# Altium PCB psyduck 2.PcbDoc
Units mm, origin at the board's own origin, x right, y up, seen from the top; angles counter-clockwise.
Board outline 38.11 x 25.41 mm, 2 copper layers (Top Layer, Bottom Layer); 15 components, 14 nets, 77 pads, 15 vias.
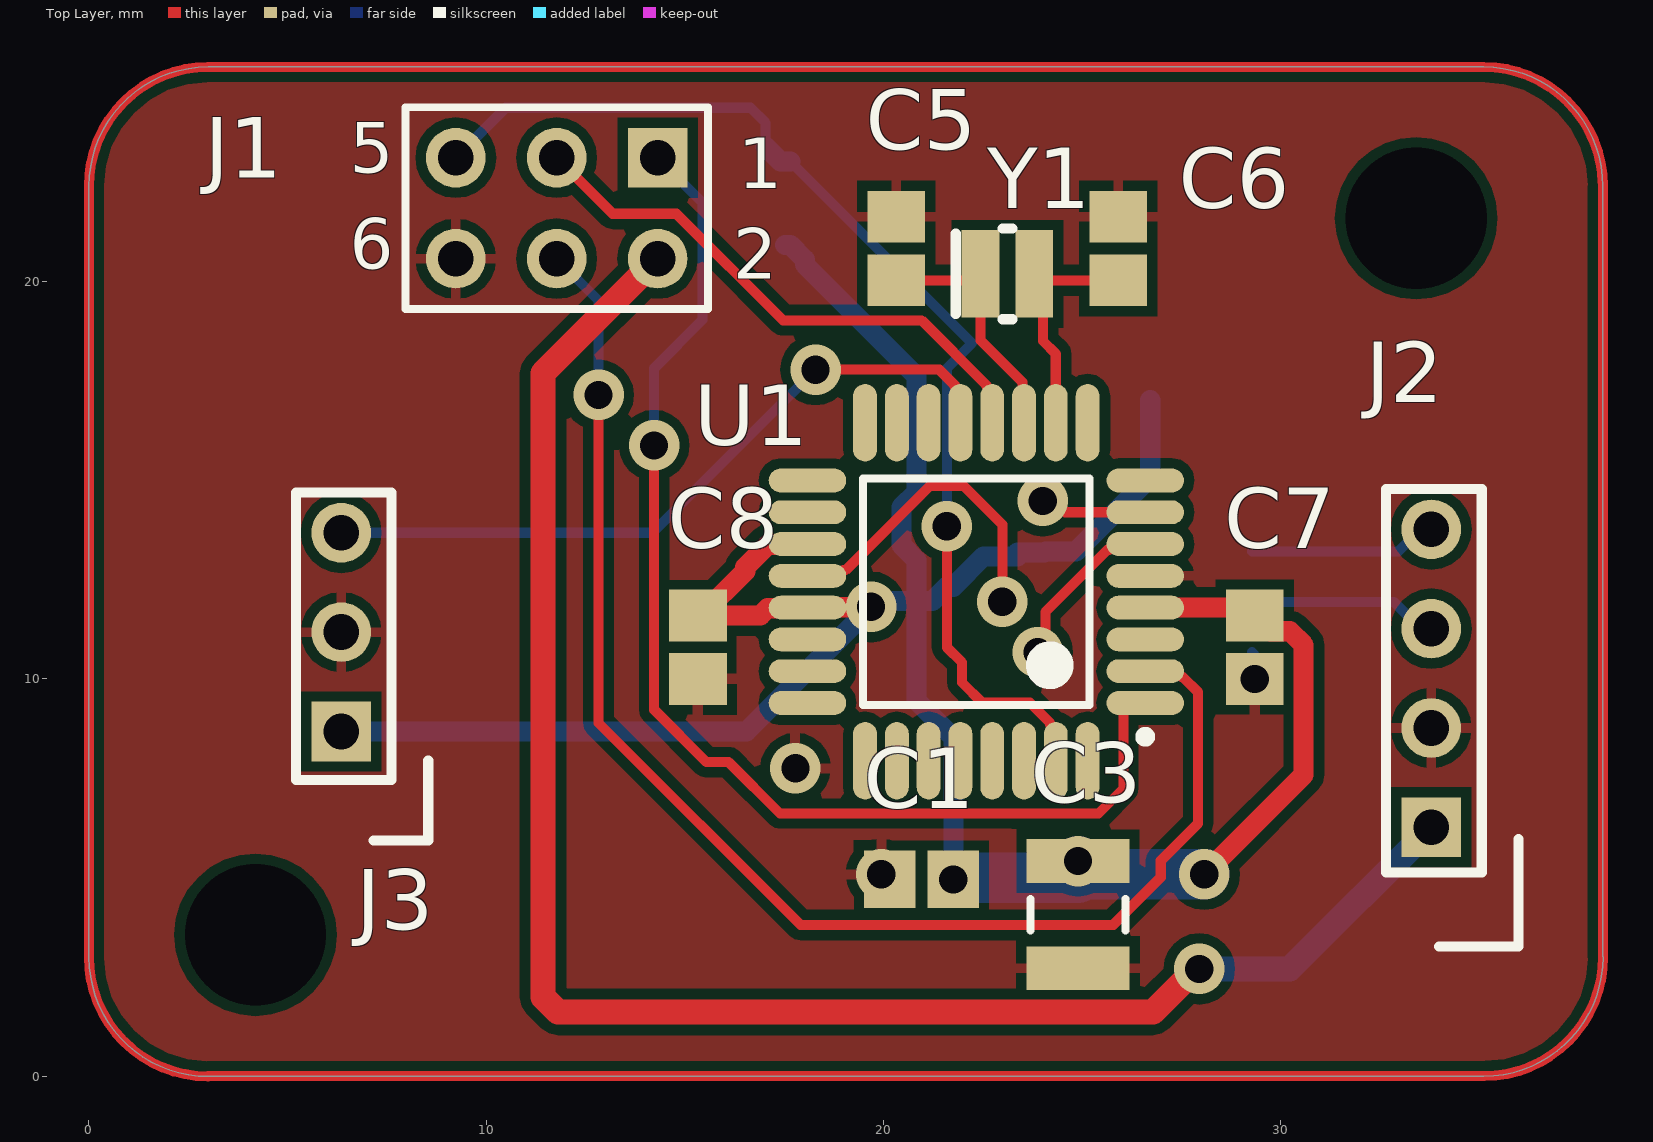
[diagram p0: Top Layer view]
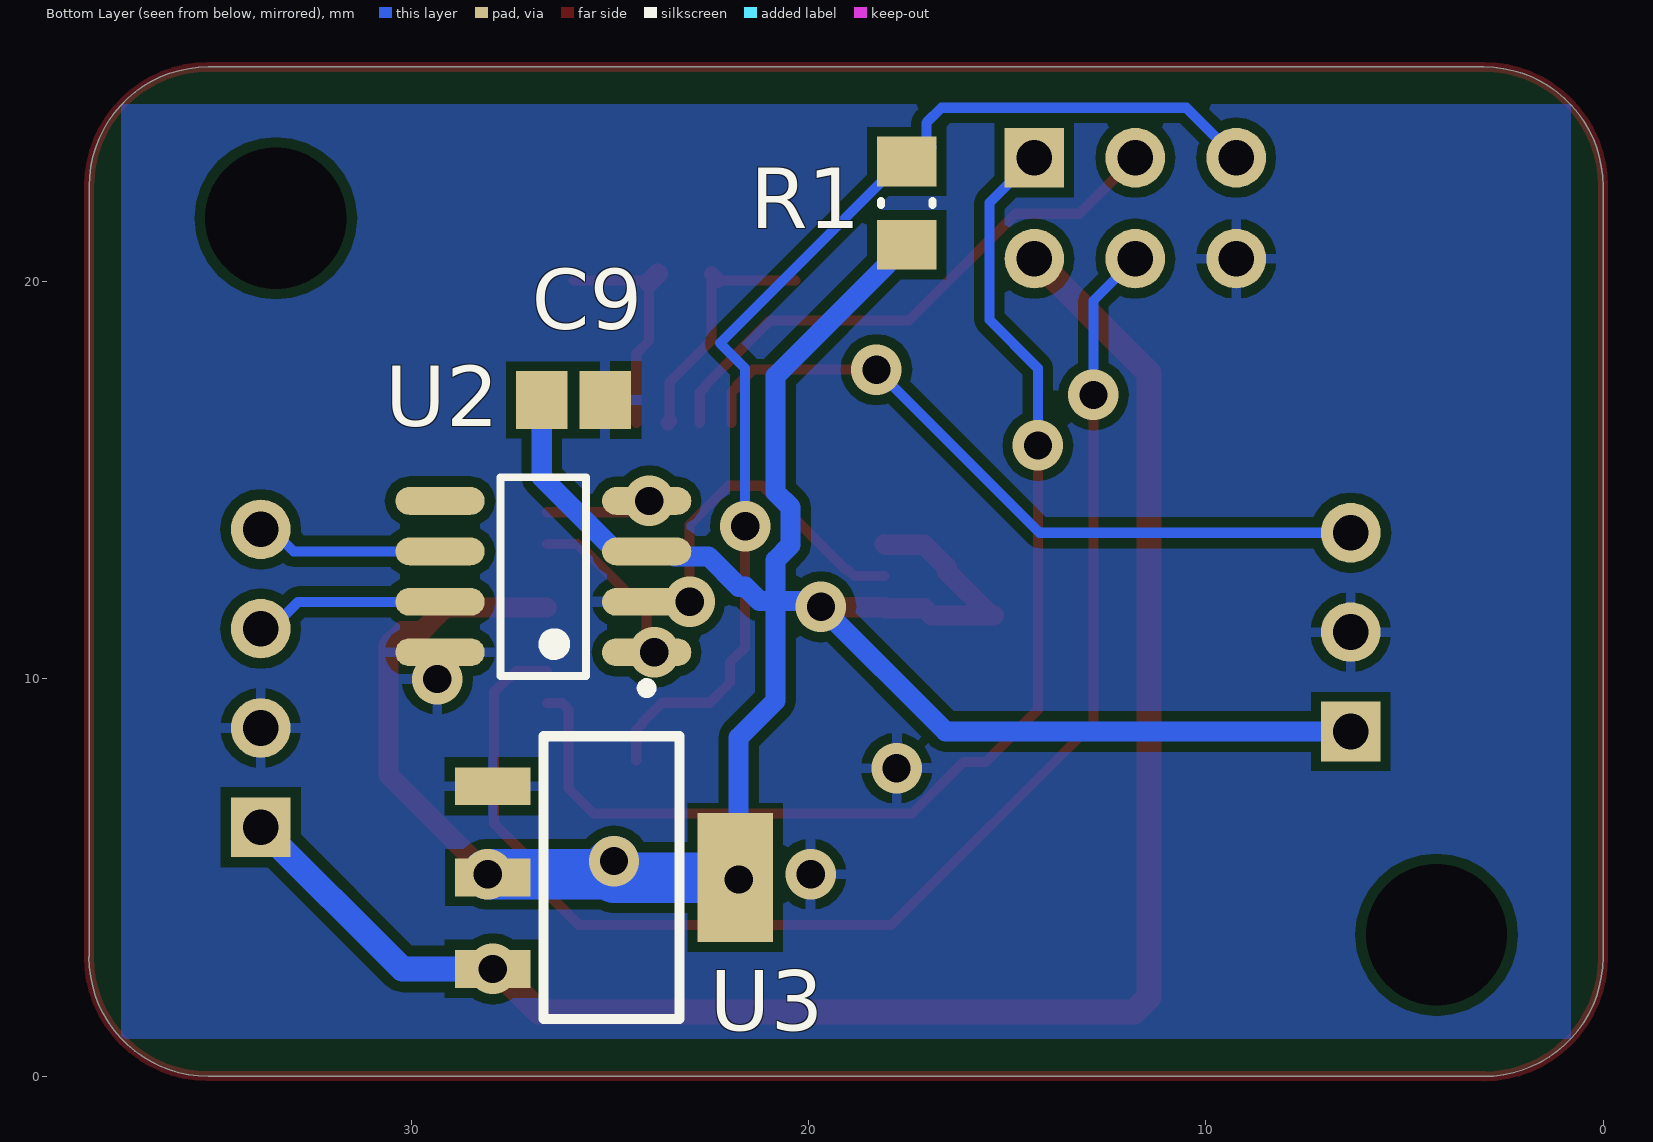
[diagram p1: Bottom Layer view, seen from below]

## Layer stack, top to bottom
Top Solder: solder mask 0.0102, Solder Resist, Dk 3.5
Top Layer: signal copper 0.0356
Dielectric 1: dielectric 0.32, FR-4, Dk 4.8
Bottom Layer: signal copper 0.0356
Bottom Solder: solder mask 0.0102, Solder Resist, Dk 3.5

## Board outline
0,2.994 0,22.4 cw(c3,22.4) 3,25.4 35.1,25.4 cw(c35.1,22.4) 38.1,22.4 38.1,3 38.106,3 cw(c35.106,3) 35.106,0 3,0 3,-0.006 cw(c3,2.994)

## Design rules (kind name [scope] priority, off if disabled: settings)
Clearance [All] p1: gap=0.254 ignorepadtopadclearanceinfootprint=FALSE except(0: Arc-Hole Track-Hole SMDPad-Hole THPad-Hole Via-Hole Fill-Hole Poly-Hole Region-Hole Text-Hole; 0.19: SMDPad-SMDPad; 0.23: Arc-SMDPad Track-SMDPad)
PolygonConnect [All] p1: connectstyle=Relief reliefconductorwidth=0.254 reliefentries=4 polygonreliefangle="90 Angle" airgapwidth=0.254
RoomDefinition Psyduck [InComponentClass('Psyduck')] p1: confinementstyle=ConfineIn formatcopy=TRUE lockcomponents=FALSE outline 0,0 38.922,0 38.922,26.289 0,26.289
RoutingVias [All] p1: holewidth=0.711 width=1.27 viastyle="Through Hole" minholewidth=0.711 minwidth=1.27 maxholewidth=0.711 maxwidth=1.27
SolderMaskExpansion [All] p1: expansion=0.102 istentingtop=FALSE
Width [All] p1: maxlimit=2 minlimit=0.254 preferedwidth=0.254 minimp=50.000000 maximp=50.000000 favimp=50.000000
30 further rules are at their usual default settings.

## Components (designator, comment, footprint, x,y, rotation, side; value= is the part's Value field where it differs from the comment)
C1 "100nF" CAPC2013X88X50NL20T25 20.955,4.953 r0 top
C3 "" C1210 24.892,4.064 r90 top value=100uF
C5 "10p" CAPC2013X88X50NL20T25 20.32,20.828 r270 top
C6 "10p" CAPC2013X88X50NL20T25 25.908,20.828 r270 top
C7 "100n" CAPC2013X88X50NL20T25 29.337,10.795 r270 top
C8 "100p" CAPC2013X88X50NL20T25 15.328,10.795 r90 top
C9 "100n" CAPC2013X88X50NL20T25 25.908,17.018 r0 bottom
J1 "ISP-6" HDR2X3 14.313,23.114 r180 top
J2 "B4B-EH-A" "JST connector" 33.782,13.763 r270 top
J3 "B3B-EH-A" B3B-EH-A 6.35,13.676 r270 top
R1 "10k" RESC0805(2012)_M 17.526,21.971 r90 bottom value="10000.00 Ohm"
U1 "ATmega32M1-AU" 32A_M 22.333,12.192 r180 top
U2 "TJA1050T/CM,118" NXP-SOT96-1_M 26.67,12.573 r0 bottom
U3 "NCP117" MCP1799 24.892,5 r270 bottom
Y1 "Crystal" XRCHA16M000F0A01R0 23.114,20.193 r0 top

## Footprints (in the part's own frame and the unit in brackets; to place one, negate y for a bottom-side part, rotate by r counter-clockwise, add the part's x,y. Pads: shape width x height; smd on the part's side, far side on the other; paste and mask are expansions set on the pad)
32A_M [mm] "Thin QFP, 32-Leads, Body 7x7mm, Pitch 0.8mm, IPC Low Density"
  oval 1.95x0.6 smd: 1(-4.25,2.8) 2(-4.25,2) 3(-4.25,1.2) 4(-4.25,0.4) 5(-4.25,-0.4) 6(-4.25,-1.2) 7(-4.25,-2) 8(-4.25,-2.8) 17(4.25,-2.8) 18(4.25,-2) 19(4.25,-1.2) 20(4.25,-0.4) 21(4.25,0.4) 22(4.25,1.2) 23(4.25,2) 24(4.25,2.8)
  oval 0.6x1.95 smd: 9(-2.8,-4.25) 10(-2,-4.25) 11(-1.2,-4.25) 12(-0.4,-4.25) 13(0.4,-4.25) 14(1.2,-4.25) 15(2,-4.25) 16(2.8,-4.25) 25(2.8,4.25) 26(2,4.25) 27(1.2,4.25) 28(0.4,4.25) 29(-0.4,4.25) 30(-1.2,4.25) 31(-2,4.25) 32(-2.8,4.25)
  silkscreen extent -4.38,-2.85 2.85,3.77, body extent -3.5,-3.5 3.5,3.5, height 1.2
B3B-EH-A [mm] "JST connector 3 pin vert"
  rect 1.5x1.5 hole 0.9: 1(5,0)
  round 1.5 hole 0.9: 2(2.5,0) 3(0,0)
  silkscreen extent -1.02,-1.14 7.74,2.19, body extent -2.37,-1.85 7.57,1.95, height 6
C1210 [mm] "Chip Capacitor, Body 3.2x2.5mm, IPC High Density"
  rect 1.1x2.6 smd: 1(-1.35,0) 2(1.35,0)
  silkscreen extent -0.4,-1.2 0.4,1.2, body extent -1.7,-1.35 1.7,1.35, height 1.3
CAPC2013X88X50NL20T25 [mm] "Chip Capacitor, 2-Leads, Body 2.00x1.25mm, IPC Medium Density"
  rect 1.3x1.45 smd: 1(-0.8,0) 2(0.8,0)
  body extent -1.1,-0.72 1.1,0.72, height 0.88
HDR2X3 [mm] "Connector; Header; 3x2 Position"
  rect 1.5x1.5 hole 0.9: 1(0,0)
  round 1.5 hole 0.9: 2(0,2.54) 3(2.54,0) 4(2.54,2.54) 5(5.08,0) 6(5.08,2.54)
  silkscreen extent -1.27,-1.27 6.35,3.81
"JST connector" [mm]
  rect 1.5x1.5 hole 0.9: 1(7.5,0)
  round 1.5 hole 0.9: 2(5,0) 3(2.5,0) 4(0,0)
  silkscreen extent -1.02,-1.14 10.5,2.2, body extent -2.44,-1.9 10.06,1.9, height 6
MCP1799 [mm] "Voltage Regulators"
  rect 0.95x1.9 smd: 1(-2.3,-3.05) 2(0,-3.05) 3(2.3,-3.05)
  rect 3.25x1.9 smd: 2(0,3.05)
  silkscreen extent -3.56,-1.78 3.56,1.65
NXP-SOT96-1_M [mm] "SOIC, 8-Leads, Body 5x4mm, Pitch 1.27mm, IPC Low Density"
  oval 2.25x0.7 smd: 1(-2.6,1.905) 2(-2.6,0.635) 3(-2.6,-0.635) 4(-2.6,-1.905) 5(2.6,-1.905) 6(2.6,-0.635) 7(2.6,0.635) 8(2.6,1.905)
  silkscreen extent -2.72,-2.5 1.07,2.93, body extent -2,-2.5 2,2.5, height 1.75
RESC0805(2012)_M [mm] "Chip Resistor, Body 2.0x1.3mm, IPC Low Density"
  rect 1.25x1.5 smd: 1(-1.05,0) 2(1.05,0)
  silkscreen extent -0.05,-0.65 0.05,0.65, body extent -1.1,-0.67 1.1,0.67, height 0.7
XRCHA16M000F0A01R0 [mm]
  rect 0.95x2.2 smd: 1(-0.675,0) 2(0.675,0)
  silkscreen extent -1.3,-1.14 0.13,1.14

## Part data
C1 C5 C6 C7 C8 C9: library part CMP-2007-00279-1, Manufacturer=Samsung, Part Number=CL21B104JBCNNNC
C3: library part "Cap Semi", "Capacitor (Semiconductor SIM Model)", LatestRevisionDate=29-May-2009, LatestRevisionNote="IPC-7351 Footprint Added.", PackageDescription="Chip Capacitor", PackageReference=C1206, Published=8-Jun-2000, Publisher="Altium Limited"
J1: library part "Header 3X2", "Header, 3-Pin, Dual row", LatestRevisionDate=17-Jul-2002, LatestRevisionNote="Re-released for DXP Platform.", Publisher="Altium Limited"
J2: library part MHDR1X4, "Header, 4-Pin", LatestRevisionDate=17-Jul-2002, LatestRevisionNote="Re-released for DXP Platform.", Publisher="Altium Limited"
J3: library part MHDR1X3, "Header, 3-Pin", LatestRevisionDate=17-Jul-2002, LatestRevisionNote="Re-released for DXP Platform.", Publisher="Altium Limited"
R1: library part CMP-1013-00528-1, Case-EIA=0805, Case-Metric=2012, Technology=SMT
U1: library part CMP-0096-00150-2, "8-bit AVR Microcontroller, 2.7-5.5V, 16MHz, 32KB Flash, 1KB EEPROM, 2KB SRAM, Industrial Grade (-40° to +85°C), 32-Pin TQFP", Code_JEDEC=MS-026-ABA, ComponentLink1Description="Manufacturer URL", ComponentLink1URL=http://www.atmel.com/, ComponentLink2Description="ATmega16M1/32M1/64M1 Datasheet", ComponentLink2URL=http://www.atmel.com/dyn/resources/prod_documents/doc8209.pdf, ComponentLink3Description="ATmega16M1/32M1/64M1 Summary", ComponentLink3URL=http://www.atmel.com/dyn/resources/prod_documents/8209S.pdf, DatasheetVersion="revD, Nov-2010", PackageDescription="32-Lead, 7x7x1.0 mm Body, 0.8mm Lead Pitch, Thin Profile Plastic Quad Flat Package (TQFP)", PackageReference=32A, PackageVersion="revC, Oct-2010", RevisionNote="DatasheetVersion & PackageVersion updated. URLs added."
U2: library part CMP-2000-04923-1, "High speed CAN transceiver, 4.75 to 5.25 V, -40 to 150 degC, 8-Pin SO (SOT96-1), RoHS, Tape and Reel", Manufacturer="NXP Semiconductors", Package / Case="8-SOIC(0.154\",3.90mmWidth)", Package Description="8-Pin Small Outline Integrated Circuit, Body 4.9 x 3.9 mm, Pitch 1.27 mm", Package Reference=SOT96-1, Standard Package=1, Supplier Device Package=8-SO, Voltage - Supply=4.75V~5.25V, <PCN>=http://media.digikey.com/pdf/PCNs/NXP/201209019F04_TJA1050_Obs.pdf, Category=IntegratedCircuits(ICs), Datasheet URL=http://www.nxp.com/documents/data_sheet/TJA1050.pdf, Datasheet Version="Rev. 4, 10/2003", Duplex=Half, Dynamic Catalog=CANTransceivers, Family=Interface-Drivers,Receivers,Transceivers, Manufacturer URL=http://www.nxp.com/, Minimum Quantity=Transceiver, Mounting Type=SurfaceMount, Number of Drivers/Receivers=1/1, Other Names=568-10292-1, Package/Case="8-SOIC(0.154\",3.90mmWidth)", Packaging=CutTape(CT), PCN Obsolescence="TJA105028/Apr/2013 /  / MultipleDevices19/Apr/2013", PCN Packaging=LighterPackingReels30/Mar/2014, Product Training Modules=CANandLINBusTransceiver, Protocol=CAN, Quantity Available=CutTape(CT)AlternatePackaging, Receiver Hysteresis=70mV, Type=Transceiver
Y1: library part XTAL, "Crystal Oscillator", LatestRevisionDate=17-Jul-2002, LatestRevisionNote="Re-released for DXP Platform.", PackageDescription="Crystal, Thru-Hole; 2 Leads; Body 3.1 x 8.2 mm (Dia.xH)", PackageReference=R38, Published=8-Jun-2000, Publisher="Altium Limited"

## Free pads (board coordinates)
  round 1.524 hole 3.556: 2(4.191,3.556) 3(33.401,21.59)

## Via types
v1: diameter 1.27, hole 0.711, Top Layer to Bottom Layer, 15 vias

## Nets (pads, with @x,y where several pads share a name; then routed paths per layer and width w, separated by ;. In a path a pad name is that pad's centre, name@x,y a point inside that pad or via, vN(x,y) a via of type N, cw(c..) or ccw(c..) an arc to the next point about the centre after c; other vN are vias at no path point)
5V: C1.2 C3.2 C7.1 C8.2 C9.2 J3.1 R1.1 U1.4 U1.19 U1.21 U2.3 U3.2 | length 69
  Top Layer w0.381: v1(21.755,4.953) C1.2@21.755,4.954
  Top Layer w0.508: C8.2 C8.2@15.403,11.595 ; U1.19 18.067,13.376 17.083,13.376 16.518,12.811 16.518,12.709 C8.2@15.403,11.595 ; v1(19.685,11.811) 19.676,11.802 18.092,11.802 U1.21 18.067,11.776 17.083,11.776 16.902,11.595 C8.2@15.403,11.595 ; U1.4 29.14,11.792 C7.1 29.733,11.199 30.226,11.199 30.57,10.855 30.57,7.583 v1(28.067,5.08)
  Bottom Layer w0.508: J3.1 16.55,8.676 v1(19.685,11.811) 19.831,11.957 20.828,11.957 ; R1.1 17.651,20.921 18.022,20.55 18.022,20.425 20.828,17.619 20.828,14.697 20.447,14.316 20.447,13.37 20.828,12.989 20.828,11.957 ; v1(21.755,4.953) 21.755,8.523 20.828,9.45 20.828,11.957 ; C9.2 26.708,15.071 24.845,13.208 U2.3 24.041,13.179 23.368,13.179 23.368,13.081 22.514,13.081 21.752,12.319 21.59,12.319 21.228,11.957 20.828,11.957
  Bottom Layer w1.27: U3.2@21.842,5 24.892,5 v1(24.892,5.414) 25.226,5.08 v1(28.067,5.08)
GND: C1.1 C3.1 C5.1 C6.1 C7.2 C8.1 C9.1 J1.6 J2.2 J3.2 U1.5 U1.20 U2.2 U2.8 U3.1 | length 8.9
  Top Layer w0.254: U1.20 18.851,12.592 18.994,12.735 19.045,12.735 21.169,14.859 22.011,14.859 22.987,13.883 v1(22.987,11.938)
  Bottom Layer w0.254: U2.8 29.337,10.601 v1(29.337,9.995)
  other v1: 19.939,5.08 17.78,7.747
NetC5_2: C5.2 U1.11 Y1.1 | length 6.4
  Top Layer w0.254: C5.2 Y1.1@22.274,20.028 ; Y1.1 22.439,18.521 23.491,17.47 U1.11@23.491,16.484
  Top Layer w0.381: Y1.1@22.274,20.028 Y1.1 ; U1.11@23.491,16.484 U1.11
NetC6_2: C6.2 U1.10 Y1.2 | length 5.9
  Top Layer w0.254: Y1.2@23.954,20.028 C6.2 ; Y1.2@24.01,19.972 24.01,18.502 24.333,18.179 U1.10
  Top Layer w0.508: Y1.2 23.954,20.028 Y1.2@24.01,19.972
NetJ1_1: J1.1 U1.1 | length 30.6
  Top Layer w0.254: v1(14.224,15.875) 14.224,9.22 15.54,7.904 16.099,7.904 17.393,6.61 25.405,6.61 26.035,7.24 26.035,9.232 26.195,9.392 U1.1
  Bottom Layer w0.254: v1(14.224,15.875) 14.224,17.815 15.444,19.035 15.444,21.983 J1.1
NetJ1_2: J1.2 J2.1 U3.3 | length 44.2
  Top Layer w0.635: J1.2 11.43,17.691 11.43,1.988 11.802,1.616 26.78,1.616 27.864,2.7 v1(27.942,2.7)
  Bottom Layer w0.635: v1(27.942,2.7) 30.219,2.7 J2.1
NetJ1_3: J1.3 U1.12 | length 14.2
  Top Layer w0.254: J1.3 13.182,21.705 14.781,21.705 17.465,19.021 20.958,19.021 22.59,17.389 22.59,17.354 22.733,17.211 U1.12
NetJ1_4: J1.4 U1.2 | length 35.5
  Top Layer w0.254: v1(12.827,17.145) 12.827,8.89 17.907,3.81 25.781,3.81 26.975,5.004 26.975,5.425 27.915,6.365 27.915,9.664 27.53,10.049 27.494,10.049 27.351,10.192 U1.2
  Bottom Layer w0.254: J1.4 12.827,19.52 v1(12.827,17.145)
NetJ1_5: J1.5 R1.2 U1.31 | length 28.9
  Top Layer w0.254: v1(21.59,13.843) 21.59,10.795 21.971,10.414 21.971,9.906 22.479,9.398 23.681,9.398 24.19,8.889 24.19,8.854 24.333,8.711 U1.31
  Bottom Layer w0.254: J1.5 10.491,24.372 16.649,24.372 17.03,23.991 R1.2@17.03,23.392 ; R1.2@17.651,23.021 22.225,18.447 21.59,17.812 v1(21.59,13.843)
  Bottom Layer w0.508: R1.2@17.03,23.392 17.401,23.021 R1.2 R1.2@17.651,23.021
NetJ2_3: J2.3 U2.7 | length 4.8
  Bottom Layer w0.254: U2.7 32.839,11.938 J2.3@33.514,11.263
  Bottom Layer w0.508: J2.3@33.514,11.263 J2.3
NetJ2_4: J2.4 U2.6 | length 4.7
  Bottom Layer w0.254: U2.6 32.959,13.208 J2.4@33.514,13.763
  Bottom Layer w0.508: J2.4@33.514,13.763 J2.4
NetJ3_3: J3.3 U1.13 | length 18.3
  Top Layer w0.254: v1(18.288,17.78) 21.399,17.78 21.79,17.389 21.79,17.354 21.933,17.211 U1.13
  Bottom Layer w0.254: J3.3 14.184,13.676 v1(18.288,17.78)
NetU1_6: U1.6 U2.1 | length 4.3
  Top Layer w0.254: v1(23.876,10.668) 24.07,10.862 24.07,11.684 25.636,13.249 25.671,13.249 25.814,13.392 U1.6
NetU1_7: U1.7 U2.4 | length 2.7
  Top Layer w0.254: v1(24.003,14.478) 24.278,14.478 24.564,14.192 U1.7
pads on no net: U1.3 U1.8 U1.9 U1.14 U1.15 U1.16 U1.17 U1.18 U1.22 U1.23 U1.24 U1.25 U1.26 U1.27 U1.28 U1.29 U1.30 U1.32 U2.5
copper on no net: | length 121.9
  Top Layer w0.254: 3,-0.006 cw(c3,2.994) 0,2.994 0,22.4 cw(c3,22.4) 3,25.4 35.1,25.4 cw(c35.1,22.4) 38.1,22.4 38.1,3 ; 3,0 35.106,0 ccw(c35.106,3) 38.106,3

## Polygon pours and split planes (outlines as drawn)
GND on Top Layer "GND_L01_P002" (solid, pour order 2): 0,25.4 0,0 38.1,0 38.1,25.4
GND on Bottom Layer "GND_L02_P003" (solid, pour order 3): 0.814,24.455 0.814,0.939 37.286,0.939 37.286,24.455

## Text inside footprints (layer, text, board x,y; h text height)
J1: Top Overlay "1" at 16.345,22.352 h1.27; Top Overlay "2" at 16.218,20.066 h1.27; Top Overlay "5" at 6.566,22.733 h1.27; Top Overlay "6" at 6.566,20.32 h1.27